# EAGLE board X04A-005-BXB (EAGLE 9.6.2)
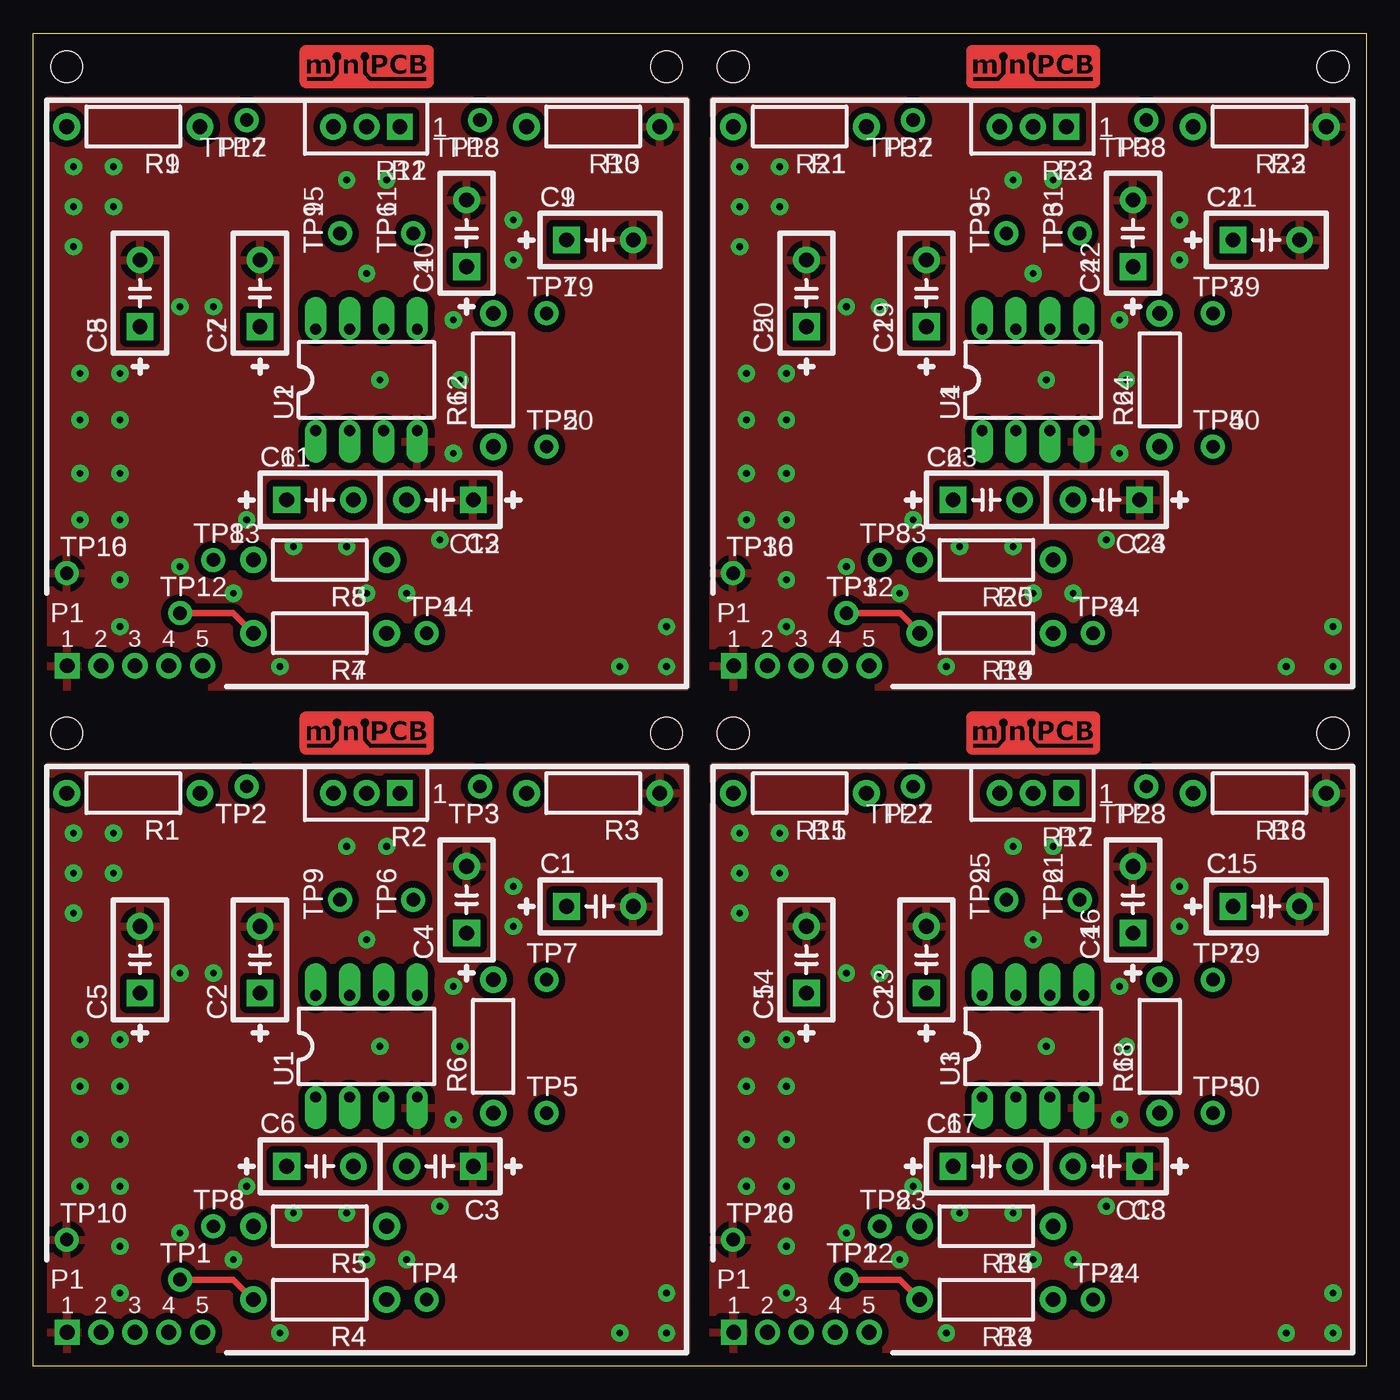
[diagram p0: board, top side]
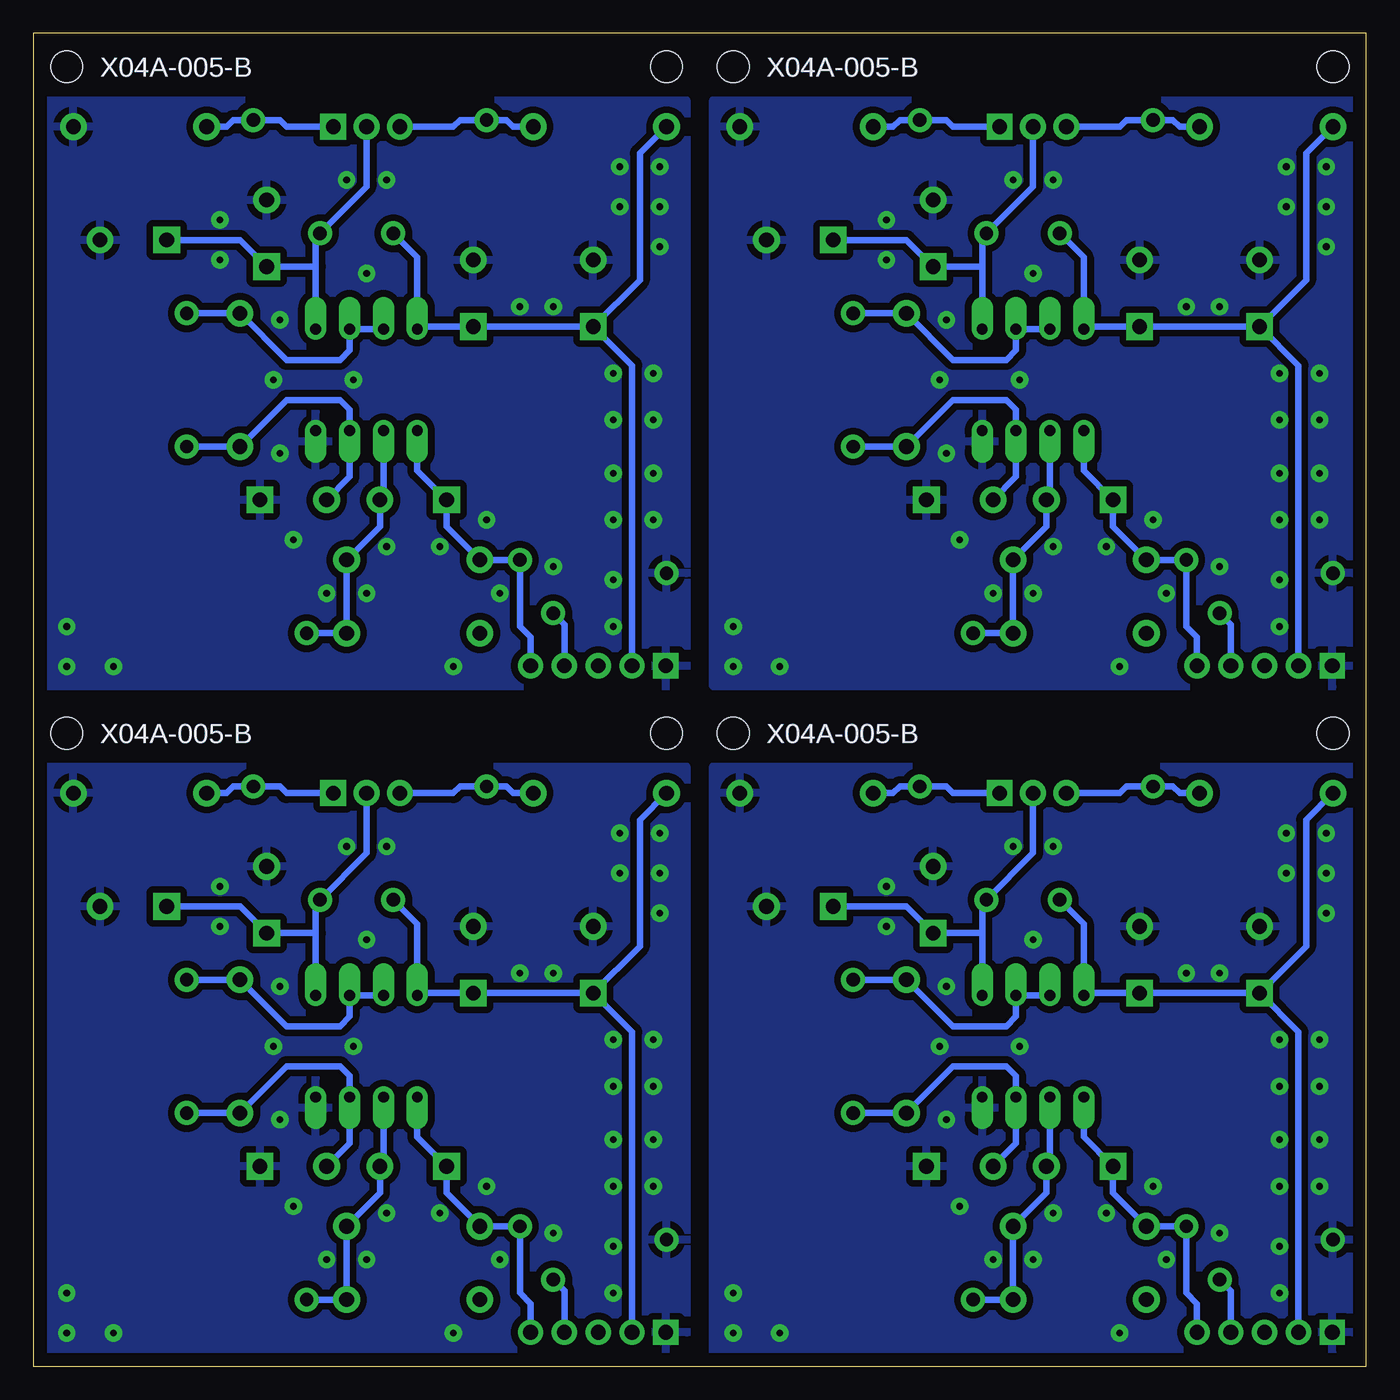
[diagram p1: board, bottom side, seen from below]

Size 100 x 100 mm. Coordinates in mm from the lower left corner, seen from the top.
Outline: 0,0 0,100 100,100 100,0 0,0
Copper layers (1*16): Top 0.035mm / dielectric 1.5mm / Bottom 0.035mm
Design rules "minipcb-THD": minimum track width 0.5mm, minimum drill 0.5mm, track to track 0.5mm, track to pad 0.5mm, pad to pad 0.5mm, via to via 0.5mm, smd to smd 0mil, copper to edge 1mm, drill to drill 1mm, minimum pad ring 0.4mm, minimum via ring 0.4mm, stop-mask expansion 0.1mm, vias tented up to drill 0.6mm, thermal gap 0.5mm

## Footprints (pad centres in the part's own frame; a part is rotated, then mirrored left to right if it is on the bottom)
C050-024X044 = drill 1.1 pad 2 square: 1 -2.5,0 | drill 1.1 pad 2: 2 2.5,0
MINIPCB_5P_50X50MM = drill 1.1 square: 1 2.54,2.54 | drill 1.1: 2 5.08,2.54; 3 7.62,2.54; 4 10.16,2.54; 5 12.7,2.54 | hole 2.4: 47.5,47.5; 2.5,47.5
0207/10 = drill 1.1 pad 2: 1 -5,0; 2 5,0
TRIM_0100 = drill 1.1 pad 1.93 square: 1 0,0 | drill 1.1 pad 1.93: 2 2.5,0; 3 5,0
PINS_1_TESTPOINT_KE5000_NOTEXT = drill 1: 1 0,0
DIL08 = drill 0.813 offset: 1 -3.81,-3.81; 2 -1.27,-3.81; 3 1.27,-3.81; 4 3.81,-3.81; 5 3.81,3.81; 6 1.27,3.81; 7 -1.27,3.81; 8 -3.81,3.81

## Placement (x,y rotation side)
C1  [C050-024X044]  42.5,34.5 0 top
C2  [C050-024X044]  17,30.5 90 top
C3  [C050-024X044]  30.5,15 180 top
C4  [C050-024X044]  32.5,35 90 top
C5  [C050-024X044]  8,30.5 90 top
C6  [C050-024X044]  21.5,15 0 top
C7  [C050-024X044]  17,80.5 90 top
C8  [C050-024X044]  8,80.5 90 top
C9  [C050-024X044]  42.5,84.5 0 top
C10  [C050-024X044]  32.5,85 90 top
C11  [C050-024X044]  21.5,65 0 top
C12  [C050-024X044]  30.5,65 180 top
C13  [C050-024X044]  67,30.5 90 top
C14  [C050-024X044]  58,30.5 90 top
C15  [C050-024X044]  92.5,34.5 0 top
C16  [C050-024X044]  82.5,35 90 top
C17  [C050-024X044]  71.5,15 0 top
C18  [C050-024X044]  80.5,15 180 top
C19  [C050-024X044]  67,80.5 90 top
C20  [C050-024X044]  58,80.5 90 top
C21  [C050-024X044]  92.5,84.5 0 top
C22  [C050-024X044]  82.5,85 90 top
C23  [C050-024X044]  71.5,65 0 top
C24  [C050-024X044]  80.5,65 180 top
E$1  [MINIPCB_PANEL_IMAGEFRAME]  -25,-30 0 top  (outside the outline)
P1-  [MINIPCB_5P_50X50MM]  0,0 0 top
P1-1  [MINIPCB_5P_50X50MM]  0,50 0 top
P1-2  [MINIPCB_5P_50X50MM]  50,0 0 top
P1-3  [MINIPCB_5P_50X50MM]  50,50 0 top
R1  [0207/10]  7.5,43 180 top
R2  [TRIM_0100]  27.5,43 180 top
R3  [0207/10]  42,43 180 top
R4  [0207/10]  21.5,5 180 top
R5  [0207/10]  21.5,10.5 180 top
R6  [0207/10]  34.5,24 90 top
R7  [0207/10]  21.5,55 180 top
R8  [0207/10]  21.5,60.5 180 top
R9  [0207/10]  7.5,93 180 top
R10  [0207/10]  42,93 180 top
R11  [TRIM_0100]  27.5,93 180 top
R12  [0207/10]  34.5,74 90 top
R13  [0207/10]  71.5,5 180 top
R14  [0207/10]  71.5,10.5 180 top
R15  [0207/10]  57.5,43 180 top
R16  [0207/10]  92,43 180 top
R17  [TRIM_0100]  77.5,43 180 top
R18  [0207/10]  84.5,24 90 top
R19  [0207/10]  71.5,55 180 top
R20  [0207/10]  71.5,60.5 180 top
R21  [0207/10]  57.5,93 180 top
R22  [0207/10]  92,93 180 top
R23  [TRIM_0100]  77.5,93 180 top
R24  [0207/10]  84.5,74 90 top
TP1  [PINS_1_TESTPOINT_KE5000_NOTEXT]  11,6.5 0 top
TP2  [PINS_1_TESTPOINT_KE5000_NOTEXT]  16,43.5 180 top
TP3  [PINS_1_TESTPOINT_KE5000_NOTEXT]  33.5,43.5 180 top
TP4  [PINS_1_TESTPOINT_KE5000_NOTEXT]  29.5,5 0 top
TP5  [PINS_1_TESTPOINT_KE5000_NOTEXT]  38.5,19 0 top
TP6  [PINS_1_TESTPOINT_KE5000_NOTEXT]  28.5,35 90 top
TP7  [PINS_1_TESTPOINT_KE5000_NOTEXT]  38.5,29 0 top
TP8  [PINS_1_TESTPOINT_KE5000_NOTEXT]  13.5,10.5 0 top
TP9  [PINS_1_TESTPOINT_KE5000_NOTEXT]  23,35 90 top
TP10  [PINS_1_TESTPOINT_KE5000_NOTEXT]  2.5,9.5 0 top
TP11  [PINS_1_TESTPOINT_KE5000_NOTEXT]  28.5,85 90 top
TP12  [PINS_1_TESTPOINT_KE5000_NOTEXT]  11,56.5 0 top
TP13  [PINS_1_TESTPOINT_KE5000_NOTEXT]  13.5,60.5 0 top
TP14  [PINS_1_TESTPOINT_KE5000_NOTEXT]  29.5,55 0 top
TP15  [PINS_1_TESTPOINT_KE5000_NOTEXT]  23,85 90 top
TP16  [PINS_1_TESTPOINT_KE5000_NOTEXT]  2.5,59.5 0 top
TP17  [PINS_1_TESTPOINT_KE5000_NOTEXT]  16,93.5 180 top
TP18  [PINS_1_TESTPOINT_KE5000_NOTEXT]  33.5,93.5 180 top
TP19  [PINS_1_TESTPOINT_KE5000_NOTEXT]  38.5,79 0 top
TP20  [PINS_1_TESTPOINT_KE5000_NOTEXT]  38.5,69 0 top
TP21  [PINS_1_TESTPOINT_KE5000_NOTEXT]  78.5,35 90 top
TP22  [PINS_1_TESTPOINT_KE5000_NOTEXT]  61,6.5 0 top
TP23  [PINS_1_TESTPOINT_KE5000_NOTEXT]  63.5,10.5 0 top
TP24  [PINS_1_TESTPOINT_KE5000_NOTEXT]  79.5,5 0 top
TP25  [PINS_1_TESTPOINT_KE5000_NOTEXT]  73,35 90 top
TP26  [PINS_1_TESTPOINT_KE5000_NOTEXT]  52.5,9.5 0 top
TP27  [PINS_1_TESTPOINT_KE5000_NOTEXT]  66,43.5 180 top
TP28  [PINS_1_TESTPOINT_KE5000_NOTEXT]  83.5,43.5 180 top
TP29  [PINS_1_TESTPOINT_KE5000_NOTEXT]  88.5,29 0 top
TP30  [PINS_1_TESTPOINT_KE5000_NOTEXT]  88.5,19 0 top
TP31  [PINS_1_TESTPOINT_KE5000_NOTEXT]  78.5,85 90 top
TP32  [PINS_1_TESTPOINT_KE5000_NOTEXT]  61,56.5 0 top
TP33  [PINS_1_TESTPOINT_KE5000_NOTEXT]  63.5,60.5 0 top
TP34  [PINS_1_TESTPOINT_KE5000_NOTEXT]  79.5,55 0 top
TP35  [PINS_1_TESTPOINT_KE5000_NOTEXT]  73,85 90 top
TP36  [PINS_1_TESTPOINT_KE5000_NOTEXT]  52.5,59.5 0 top
TP37  [PINS_1_TESTPOINT_KE5000_NOTEXT]  66,93.5 180 top
TP38  [PINS_1_TESTPOINT_KE5000_NOTEXT]  83.5,93.5 180 top
TP39  [PINS_1_TESTPOINT_KE5000_NOTEXT]  88.5,79 0 top
TP40  [PINS_1_TESTPOINT_KE5000_NOTEXT]  88.5,69 0 top
U1  [DIL08]  25,24 0 top
U2  [DIL08]  25,74 0 top
U3  [DIL08]  75,24 0 top
U4  [DIL08]  75,74 0 top

## Library data of the parts
C1-C24 E$1 R1-R24 TP1-TP40 U1-U4 = minipcb
P1- P1-1-P1-3 = minipcb; PART_NUMBER: X04A-005-B; REVISION: B

## Nets
GND: C1.2 C2.2 C3.1 C4.2 C5.2 P1-.1 R3.1 TP10.1 U1.4
GND1: C7.2 C8.2 C9.2 C10.2 C12.1 P1-1.1 R10.1 TP16.1 U2.4
GND2: C13.2 C14.2 C15.2 C16.2 C18.1 P1-2.1 R16.1 TP26.1 U3.4
GND3: C19.2 C20.2 C21.2 C22.2 C24.1 P1-3.1 R22.1 TP36.1 U4.4
IN: P1-.4 R4.2 TP1.1
IN1: P1-1.4 R7.2 TP12.1
IN2: P1-2.4 R13.2 TP22.1
IN3: P1-3.4 R19.2 TP32.1
N$1: C1.1 C4.1 R2.2 TP6.1 U1.5
N$2: C3.2 R6.1 TP5.1 U1.3
N$3: C9.1 C10.1 R11.2 TP11.1 U2.5
N$4: C12.2 R12.1 TP20.1 U2.3
N$5: C15.1 C16.1 R17.2 TP21.1 U3.5
N$6: C18.2 R18.1 TP30.1 U3.3
N$7: C21.1 C22.1 R23.2 TP31.1 U4.5
N$8: C24.2 R24.1 TP40.1 U4.3
NC: P1-.3
NC1: P1-1.3
NC2: P1-2.3
NC3: P1-3.3
OUT: C6.1 P1-.5 R5.2 TP8.1 U1.1
OUT1: C11.1 P1-1.5 R8.2 TP13.1 U2.1
OUT2: C17.1 P1-2.5 R14.2 TP23.1 U3.1
OUT3: C23.1 P1-3.5 R20.2 TP33.1 U4.1
P1.1: R2.1 R3.2 TP3.1
P1.2: R9.1 R11.3 TP17.1
P1.3: R1.1 R2.3 TP2.1
P1.4: R10.2 R11.1 TP18.1
P1.5: R15.1 R17.3 TP27.1
P1.6: R16.2 R17.1 TP28.1
P1.7: R21.1 R23.3 TP37.1
P1.8: R22.2 R23.1 TP38.1
V+: C2.1 C5.1 P1-.2 R1.2 TP9.1 U1.8
V+1: C7.1 C8.1 P1-1.2 R9.2 TP15.1 U2.8
V+2: C13.1 C14.1 P1-2.2 R15.2 TP25.1 U3.8
V+3: C19.1 C20.1 P1-3.2 R21.2 TP35.1 U4.8
VFB: C6.2 R4.1 R5.1 TP4.1 U1.2
VFB1: C11.2 R7.1 R8.1 TP14.1 U2.2
VFB2: C17.2 R13.1 R14.1 TP24.1 U3.2
VFB3: C23.2 R19.1 R20.1 TP34.1 U4.2
VREF: R6.2 TP7.1 U1.6 U1.7
VREF1: R12.2 TP19.1 U2.6 U2.7
VREF2: R18.2 TP29.1 U3.6 U3.7
VREF3: R24.2 TP39.1 U4.6 U4.7

## Tracks (layer width: path | path; a pad name or v marks a point on that pad's centre or on a via)
GND  (via drill 0.5)
  other vias: 6.5,5.5 6.5,9 6.5,13.5 6.5,17 25,8 15,8 30.5,12 28,8 16,13.5 26,24 32,24 31.5,28.5 31.5,18.5 25,32 23.5,39 26.5,39 6,40 3,40 3,37 3,34 6.5,21 6.5,24.5 11,29.5 13.5,29.5 36,36 36,33 6,37 47.5,2.5 47.5,5.5 44,2.5 3.5,13.5 3.5,17 3.5,21 3.5,24.5 11,10 19.5,11.5 23.5,11.5 18.5,2.5
  pour Top: 1,1 49,1 49,45 1,45
  pour Bottom (isolate 0.3): 1,1 49,1 49,45 1,45
GND1  (via drill 0.5)
  other vias: 6.5,55.5 6.5,59 6.5,63.5 6.5,67 25,58 15,58 30.5,62 28,58 16,63.5 26,74 32,74 31.5,78.5 31.5,68.5 25,82 23.5,89 26.5,89 6,90 3,90 3,87 3,84 6.5,71 6.5,74.5 11,79.5 13.5,79.5 36,86 36,83 6,87 47.5,52.5 47.5,55.5 44,52.5 3.5,63.5 3.5,67 3.5,71 3.5,74.5 11,60 19.5,61.5 23.5,61.5 18.5,52.5
  pour Top: 1,51 49,51 49,95 1,95
  pour Bottom (isolate 0.3): 1,51 49,51 49,95 1,95
GND2  (via drill 0.5)
  other vias: 56.5,5.5 56.5,9 56.5,13.5 56.5,17 75,8 65,8 80.5,12 78,8 66,13.5 76,24 82,24 81.5,28.5 81.5,18.5 75,32 73.5,39 76.5,39 56,40 53,40 53,37 53,34 56.5,21 56.5,24.5 61,29.5 63.5,29.5 86,36 86,33 56,37 97.5,2.5 97.5,5.5 94,2.5 53.5,13.5 53.5,17 53.5,21 53.5,24.5 61,10 69.5,11.5 73.5,11.5 68.5,2.5
  pour Top: 51,1 99,1 99,45 51,45
  pour Bottom (isolate 0.3): 51,1 99,1 99,45 51,45
GND3  (via drill 0.5)
  other vias: 56.5,55.5 56.5,59 56.5,63.5 56.5,67 75,58 65,58 80.5,62 78,58 66,63.5 76,74 82,74 81.5,78.5 81.5,68.5 75,82 73.5,89 76.5,89 56,90 53,90 53,87 53,84 56.5,71 56.5,74.5 61,79.5 63.5,79.5 86,86 86,83 56,87 97.5,52.5 97.5,55.5 94,52.5 53.5,63.5 53.5,67 53.5,71 53.5,74.5 61,60 69.5,61.5 73.5,61.5 68.5,52.5
  pour Top: 51,51 99,51 99,95 51,95
  pour Bottom (isolate 0.3): 51,51 99,51 99,95 51,95
IN
  Top 0.5: TP1.1 15,6.5 R4.2
  Bottom 0.5: P1-.4 10.16,5.66 TP1.1
IN1
  Top 0.5: TP12.1 15,56.5 R7.2
  Bottom 0.5: P1-1.4 10.16,55.66 TP12.1
IN2
  Top 0.5: TP22.1 65,6.5 R13.2
  Bottom 0.5: P1-2.4 60.16,5.66 TP22.1
IN3
  Top 0.5: TP32.1 65,56.5 R19.2
  Bottom 0.5: P1-3.4 60.16,55.66 TP32.1
N$1
  Bottom 0.5: R2.2 25,38.5 TP6.1 28.81,34.69 28.81,32.5 | U1.5 28.81,32.5 | 28.81,32.5 C4.1 34.5,34.5 C1.1
N$2
  Bottom 0.5: TP5.1 R6.1 31,22.5 27,22.5 26.27,21.77 U1.3 26.27,16.73 C3.2
N$3
  Bottom 0.5: R11.2 25,88.5 TP11.1 28.81,84.69 28.81,82.5 | U2.5 28.81,82.5 | 28.81,82.5 C10.1 34.5,84.5 C9.1
N$4
  Bottom 0.5: TP20.1 R12.1 31,72.5 27,72.5 26.27,71.77 U2.3 26.27,66.73 C12.2
N$5
  Bottom 0.5: R17.2 75,38.5 TP21.1 78.81,34.69 78.81,32.5 | U3.5 78.81,32.5 | 78.81,32.5 C16.1 84.5,34.5 C15.1
N$6
  Bottom 0.5: TP30.1 R18.1 81,22.5 77,22.5 76.27,21.77 U3.3 76.27,16.73 C18.2
N$7
  Bottom 0.5: R23.2 75,88.5 TP31.1 78.81,84.69 78.81,82.5 | U4.5 78.81,82.5 | 78.81,82.5 C22.1 84.5,84.5 C21.1
N$8
  Bottom 0.5: TP40.1 R24.1 81,72.5 77,72.5 76.27,71.77 U4.3 76.27,66.73 C24.2
OUT
  Bottom 0.5: U1.1 21.19,17.19 C6.1 19,13 R5.2 TP8.1 13.5,5.5 12.7,4.7 P1-.5
OUT1
  Bottom 0.5: U2.1 21.19,67.19 C11.1 19,63 R8.2 TP13.1 13.5,55.5 12.7,54.7 P1-1.5
OUT2
  Bottom 0.5: U3.1 71.19,17.19 C17.1 69,13 R14.2 TP23.1 63.5,5.5 62.7,4.7 P1-2.5
OUT3
  Bottom 0.5: U4.1 71.19,67.19 C23.1 69,63 R20.2 TP33.1 63.5,55.5 62.7,54.7 P1-3.5
P1.1
  Bottom 0.5: R2.1 31,43 31.5,43.5 TP3.1 35,43.5 35.5,43 R3.2
P1.2
  Bottom 0.5: R9.1 14,93 14.5,93.5 TP17.1 18,93.5 18.5,93 R11.3
P1.3
  Bottom 0.5: R1.1 14,43 14.5,43.5 TP2.1 18,43.5 18.5,43 R2.3
P1.4
  Bottom 0.5: R11.1 31,93 31.5,93.5 TP18.1 35,93.5 35.5,93 R10.2
P1.5
  Bottom 0.5: R15.1 64,43 64.5,43.5 TP27.1 68,43.5 68.5,43 R17.3
P1.6
  Bottom 0.5: R17.1 81,43 81.5,43.5 TP28.1 85,43.5 85.5,43 R16.2
P1.7
  Bottom 0.5: R21.1 64,93 64.5,93.5 TP37.1 68,93.5 68.5,93 R23.3
P1.8
  Bottom 0.5: R23.1 81,93 81.5,93.5 TP38.1 85,93.5 85.5,93 R22.2
V+
  Bottom 0.5: C5.1 4.5,31.5 4.5,41 R1.2 | C5.1 C2.1 21,28 U1.8 21.19,33.19 TP9.1 | C5.1 5.08,25.08 P1-.2
V+1
  Bottom 0.5: C8.1 4.5,81.5 4.5,91 R9.2 | C8.1 C7.1 21,78 U2.8 21.19,83.19 TP15.1 | C8.1 5.08,75.08 P1-1.2
V+2
  Bottom 0.5: C14.1 54.5,31.5 54.5,41 R15.2 | C14.1 C13.1 71,28 U3.8 71.19,33.19 TP25.1 | C14.1 55.08,25.08 P1-2.2
V+3
  Bottom 0.5: C20.1 54.5,81.5 54.5,91 R21.2 | C20.1 C19.1 71,78 U4.8 71.19,83.19 TP35.1 | C20.1 55.08,75.08 P1-3.2
VFB
  Bottom 0.5: U1.2 23.73,15.27 C6.2 24,13 R5.1 R4.1 TP4.1
VFB1
  Bottom 0.5: U2.2 23.73,65.27 C11.2 24,63 R8.1 R7.1 TP14.1
VFB2
  Bottom 0.5: U3.2 73.73,15.27 C17.2 74,13 R14.1 R13.1 TP24.1
VFB3
  Bottom 0.5: U4.2 73.73,65.27 C23.2 74,63 R20.1 R19.1 TP34.1
VREF
  Bottom 0.5: U1.7 U1.6 26.27,26.23 27,25.5 31,25.5 R6.2 TP7.1
VREF1
  Bottom 0.5: U2.7 U2.6 26.27,76.23 27,75.5 31,75.5 R12.2 TP19.1
VREF2
  Bottom 0.5: U3.7 U3.6 76.27,26.23 77,25.5 81,25.5 R18.2 TP29.1
VREF3
  Bottom 0.5: U4.7 U4.6 76.27,76.23 77,75.5 81,75.5 R24.2 TP39.1

## Text on the board
_tNames: TP2 | TP3 | TP2 | TP3 | R1 | R3 | R1 | R3 | R2 | R2 | C1 | C1 | TP9 | TP6 | TP9 | TP6 | C4 | TP7 | C4 | TP7 | C5 | C2 | C5 | C2 | U1 | R6 | U1 | R6 | TP5 | TP5 | C6 | C6 | TP8 | C3 | TP8 | C3 | TP10 | TP10 | R5 | R5 | TP1 | TP1 | TP4 | TP4 | R4 | R4 | TP2 | TP3 | TP2 | TP3 | R1 | R3 | R1 | R3 | R2 | R2 | C1 | C1 | TP9 | TP6 | TP9 | TP6 | C4 | TP7 | C4 | TP7 | C5 | C2 | C5 | C2 | U1 | R6 | U1 | R6 | TP5 | TP5 | C6 | C6 | TP8 | C3 | TP8 | C3 | TP10 | TP10 | R5 | R5 | TP1 | TP1 | TP4 | TP4 | R4 | R4